# Altium PCB ADC_PCB.PcbDoc
Units mil, origin at the board's own origin, x right, y up, seen from the top; angles counter-clockwise.
Board outline 2700 x 1900 mil, 4 copper layers (Top Layer, VDD, GND, Bottom Layer), stack 23.756 mil thick; 46 components, 27 nets, 144 pads, 55 vias.
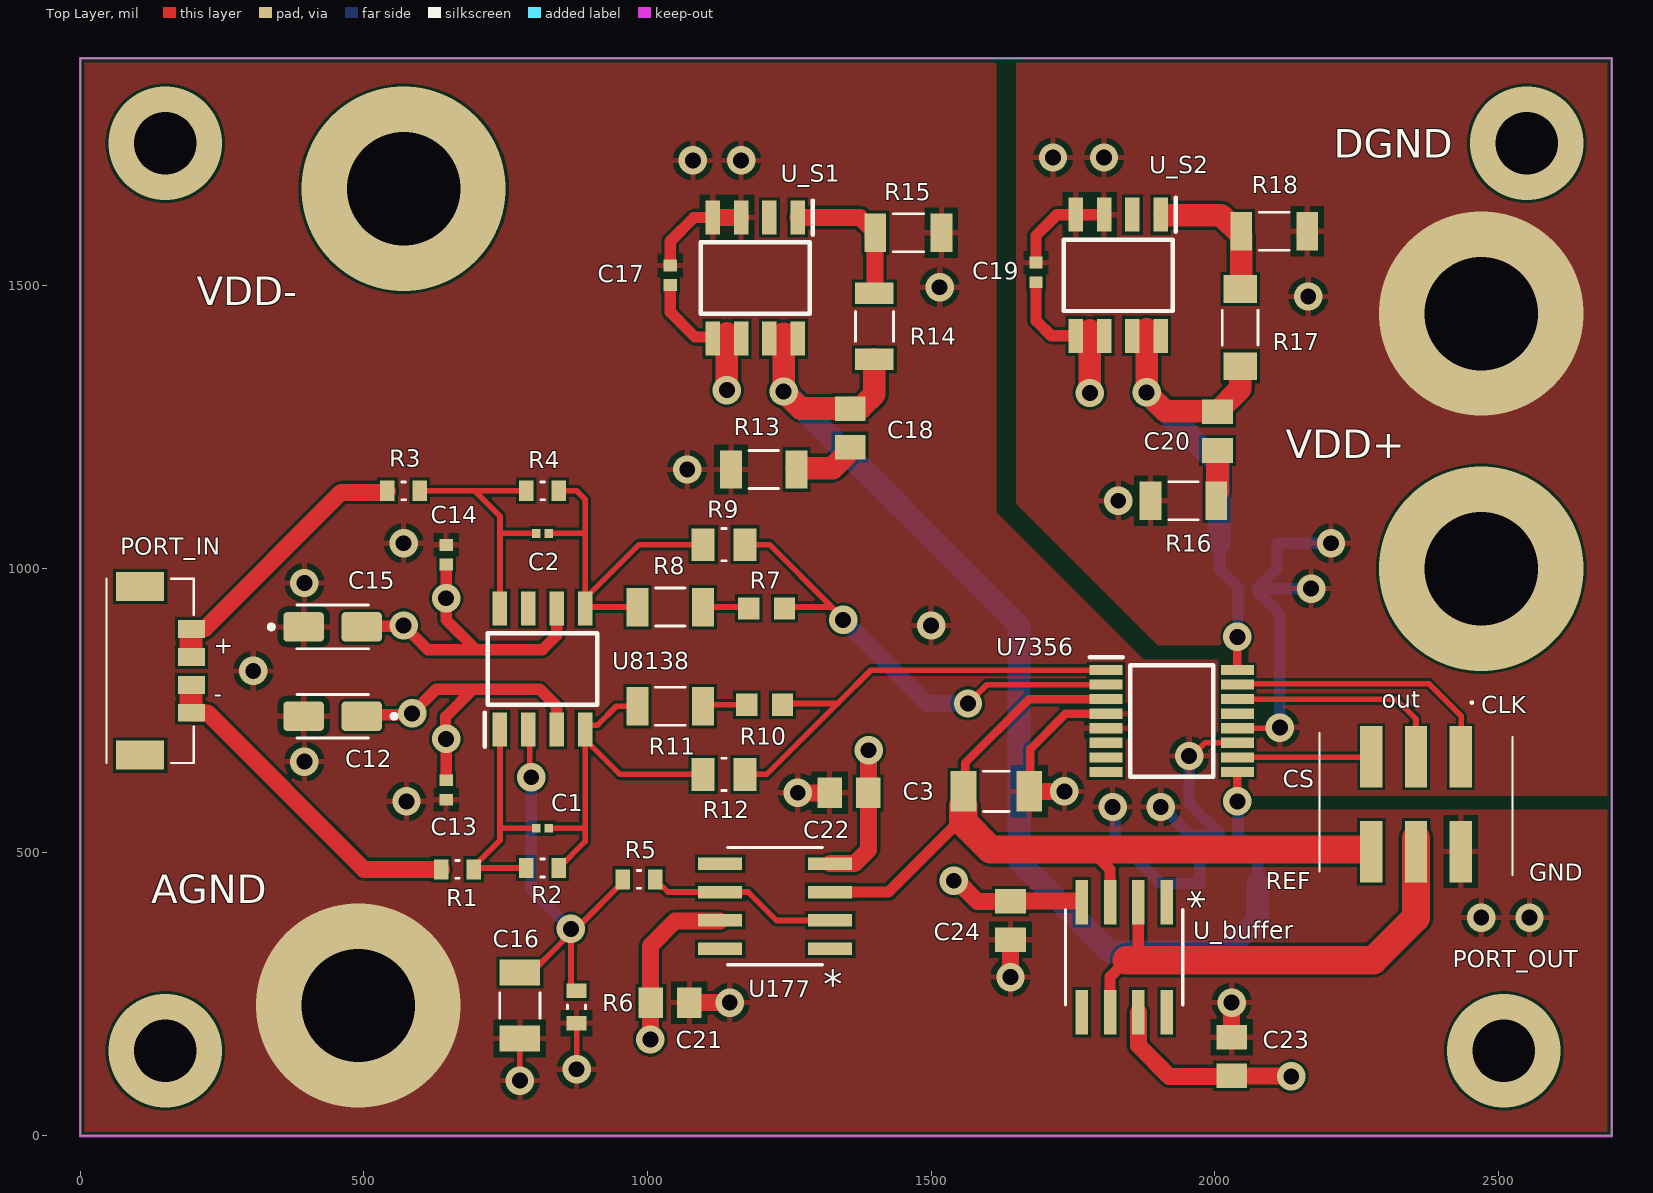
[diagram p0: Top Layer view]
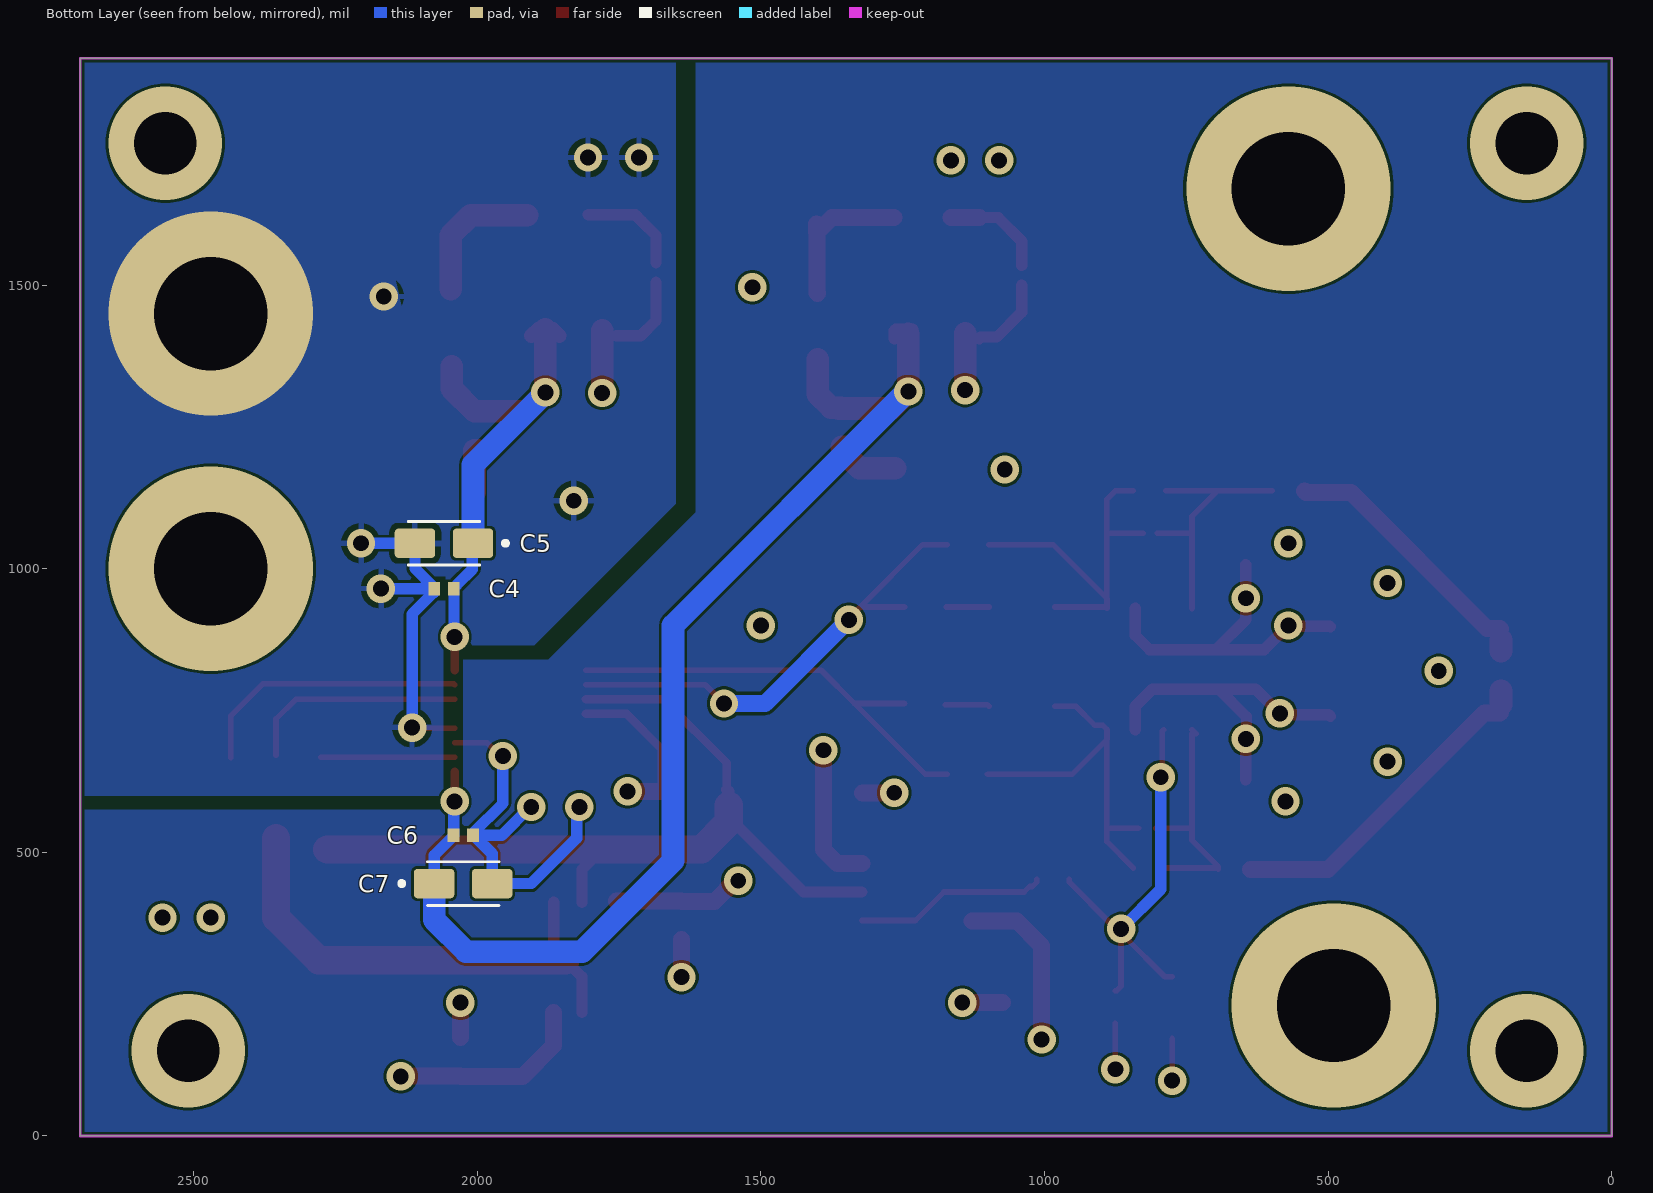
[diagram p1: Bottom Layer view, seen from below]
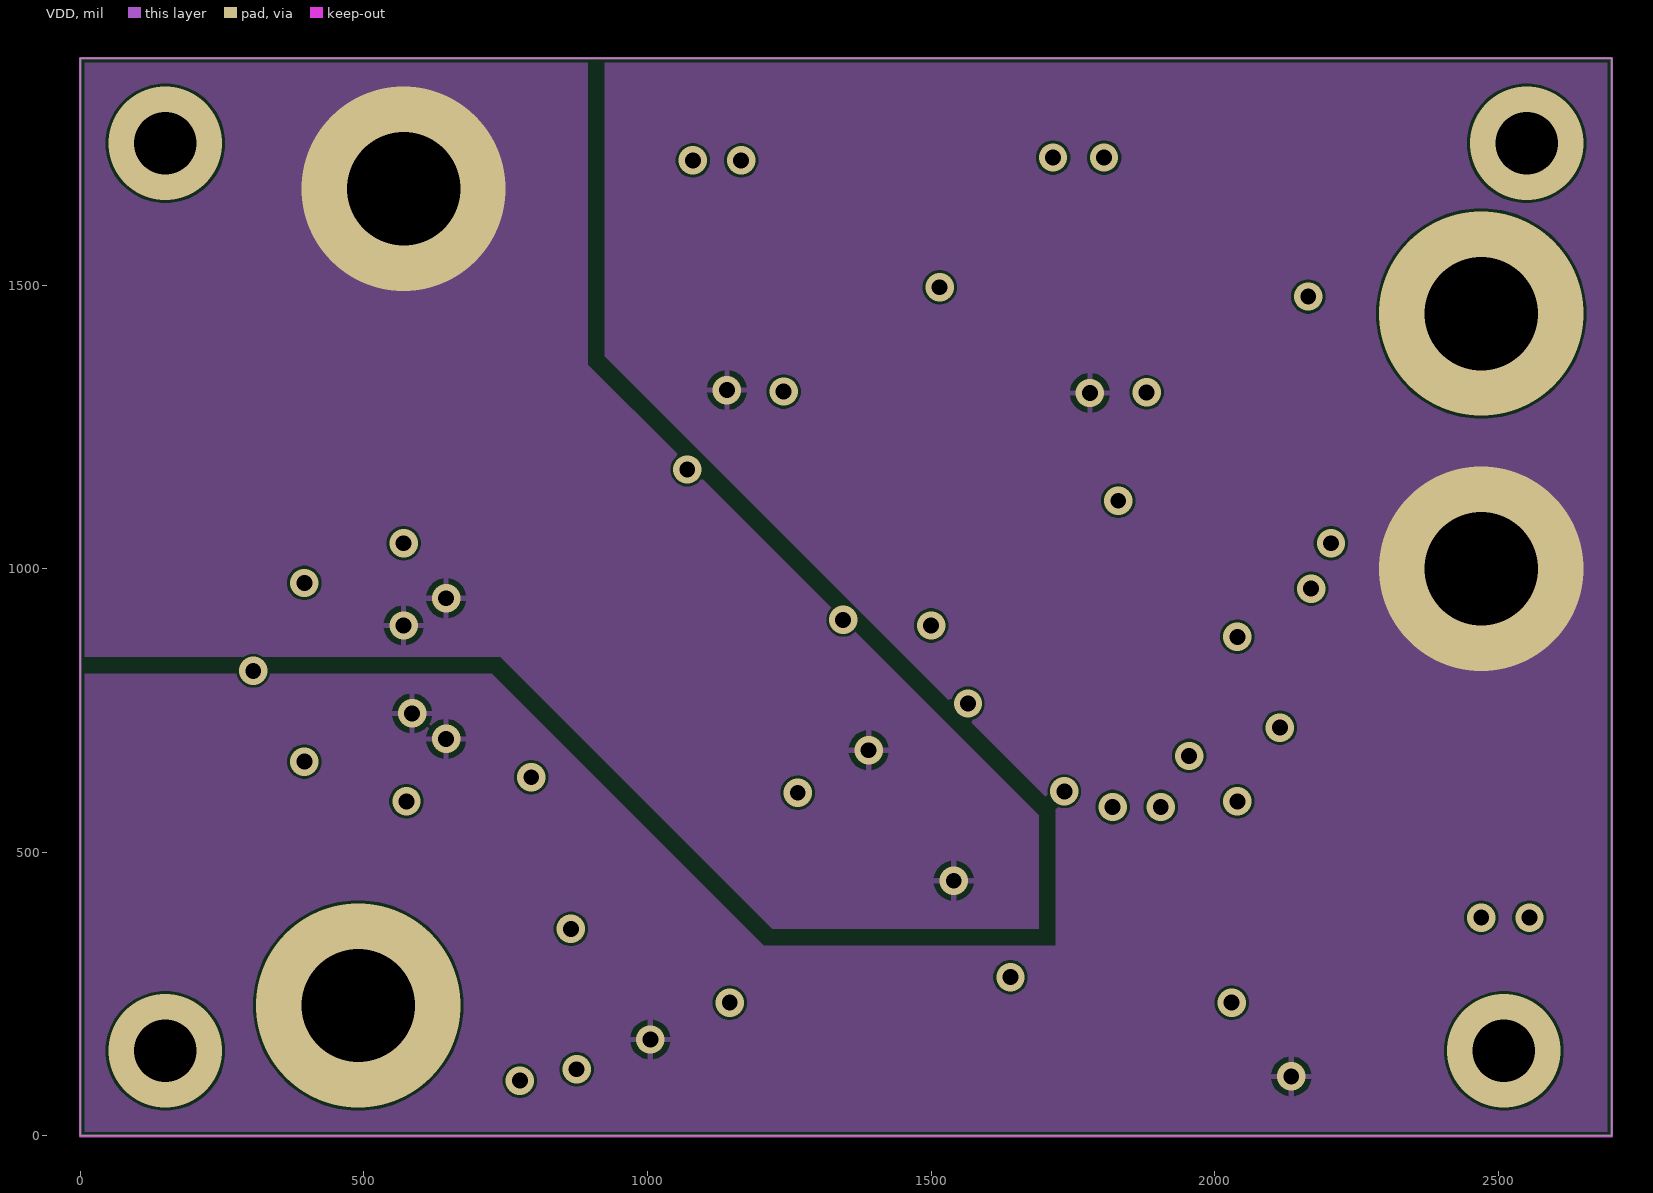
[diagram p2: VDD]
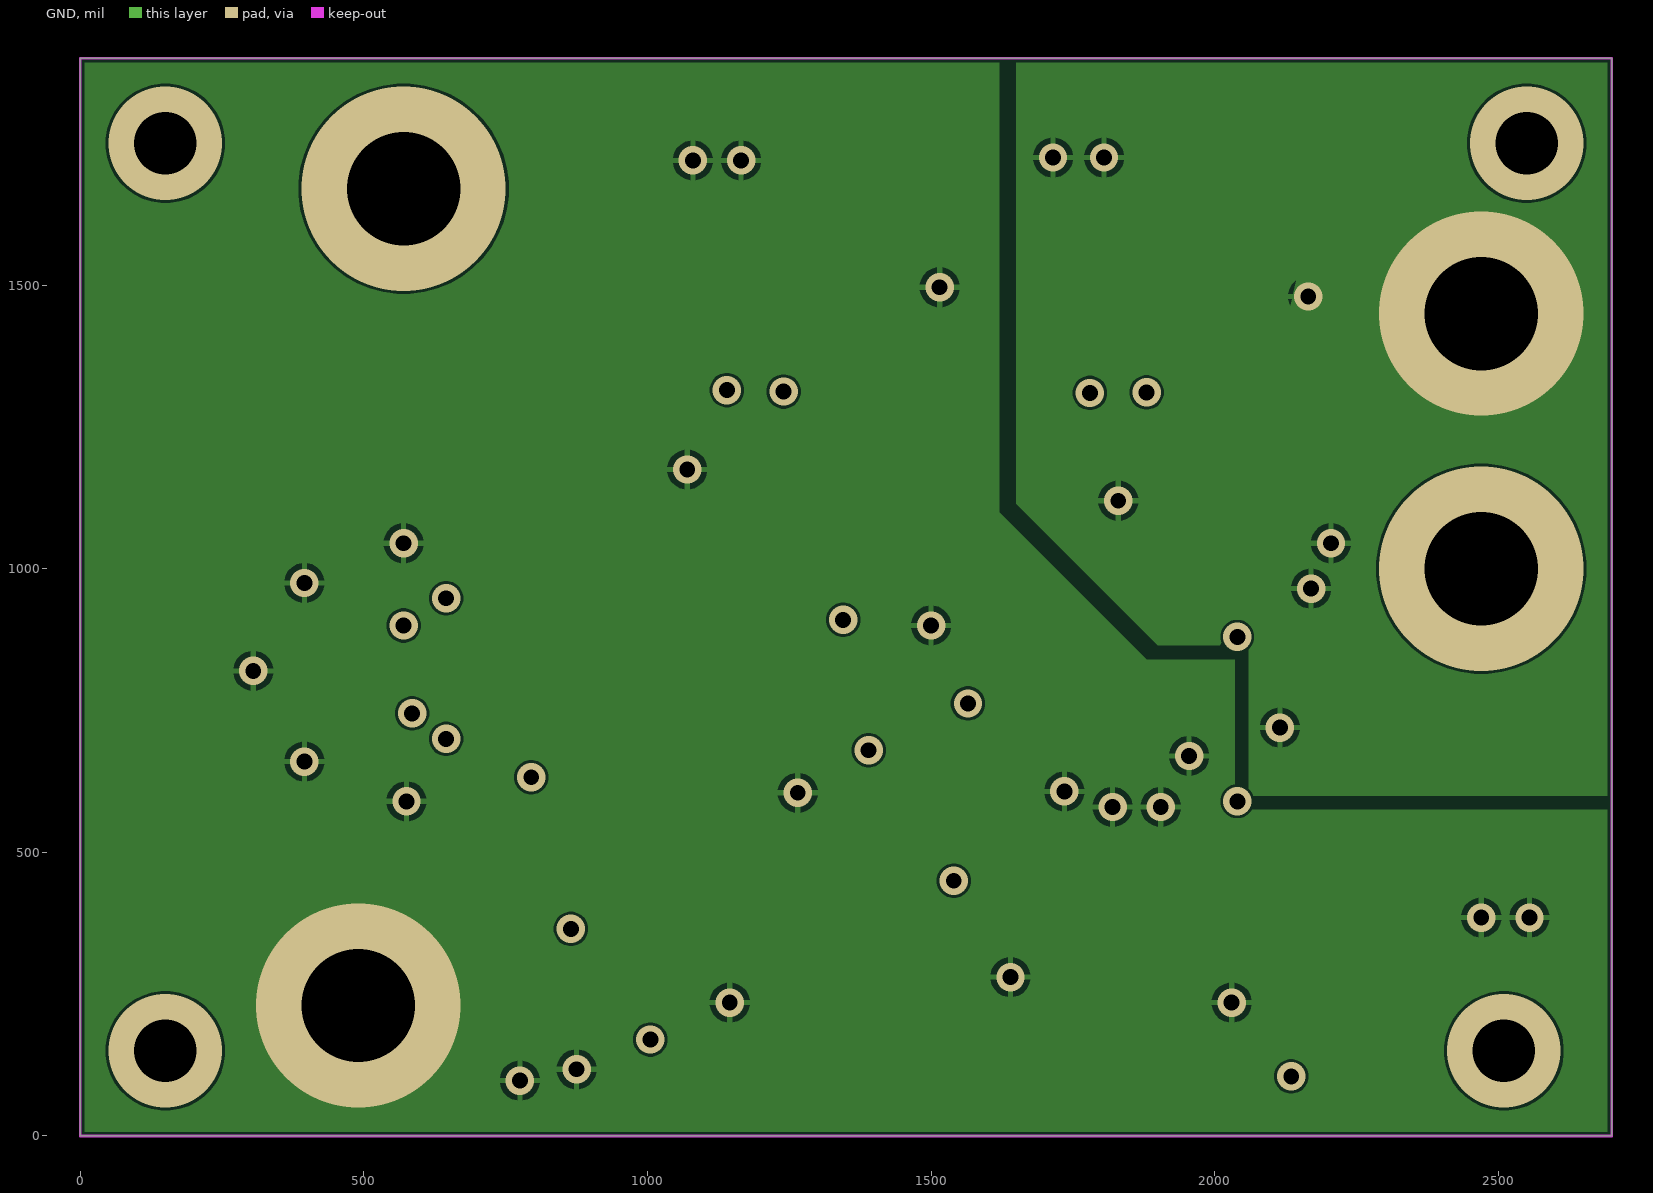
[diagram p3: GND]

## Layer stack, top to bottom
Top Solder: solder mask 0.4, Solder Resist, Dk 3.5
Top Layer: signal copper 1.4
Dielectric 1: prepreg 2.8, PP-006, Dk 4.1
VDD: signal copper 1.378
Dielectric 2: prepreg 12.6, FR-4, Dk 4.8
GND: signal copper 1.378
Dielectric 3: prepreg 2.8, PP-006, Dk 4.1
Bottom Layer: signal copper 1.4
Bottom Solder: solder mask 0.4, Solder Resist, Dk 3.5

## Board outline
0,0 2700,0 2700,1900 0,1900

## Design rules (kind name [scope] priority, off if disabled: settings)
Clearance [All] p1: gap=5 ignorepadtopadclearanceinfootprint=FALSE
PolygonConnect [All] p1: connectstyle=Relief reliefconductorwidth=10 reliefentries=4 polygonreliefangle="90 Angle" airgapwidth=10
RoutingVias [All] p1: holewidth=28 width=50 viastyle="Through Hole" minholewidth=28 minwidth=50 maxholewidth=400 maxwidth=500
SilkToSilkClearance [All] p1: silktosilkclearance=5
SolderMaskExpansion [All] p1: expansion=4 istentingtop=FALSE
Width [All] p1: maxlimit=100 minlimit=10 preferedwidth=10
29 further rules are at their usual default settings.

## Classes and differential pairs
component class ADC_Connectors: PORT_IN PORT_OUT

## Components (designator, comment, footprint, x,y, rotation, side; value= is the part's Value field where it differs from the comment)
C1 "GRM0335C1E390JA01D" CAPC0603X33N 815,542.5 r180 top
C2 "GRM0335C1E390JA01D" CAPC0603X33N 815,1062.5 r180 top
C3 "1206ZC106KAT2A" CAPC3216X178N 1615,607.5 r0 top
C4 "C1005X5R1C104K050BA" CAPC1005X55N 2058.82,965 r0 bottom
C5 "TAJA106M010RNJ" CAPMP3216X180N 2058.82,1045 r0 bottom
C6 "C1005X5R1C104K050BA" CAPC1005X55N 2025,530 r180 bottom
C7 "TAJA106M010RNJ" CAPMP3216X180N 2025,445 r180 bottom
C12 "TAJA106M010RNJ" CAPMP3216X180N 445,740 r180 top
C13 "C1005X5R1C104K050BA" CAPC1005X55N 645,610 r270 top
C14 "C1005X5R1C104K050BA" CAPC1005X55N 645,1025 r270 top
C15 "TAJA106M010RNJ" CAPMP3216X180N 445,897.5 r0 top
C16 "1206ZC106KAT2A" CAPC3216X178N 775,230 r90 top
C17 "C1005X5R1C104K050BA" CAPC1005X55N 1040,1517.5 r90 top
C18 "CL21A475KQFNNNG" CAPC2012X135N 1357.34,1248.52 r270 top
C19 "C1005X5R1C104K050BA" CAPC1005X55N 1685,1522.5 r90 top
C20 "CL21A475KQFNNNG" CAPC2012X135N 2005,1242.5 r270 top
C21 "CL21A106KPFNNNG" CAPC2012X135N 1040,235 r0 top
C22 "CL21A106KPFNNNG" CAPC2012X135N 1355,605 r180 top
C23 "CL21A106KPFNNNG" CAPC2012X135N 2030,140 r90 top
C24 "CL21A106KPFNNNG" CAPC2012X135N 1640,380 r270 top
PORT_IN "505567-0481" 5055670481 132.95,820 r90 top
PORT_OUT "87832-0628" 878320628 2355,585 r180 top
R1 "ERA3ARW103V" RES_ERA3ARW103V 665,470 r180 top
R2 "ERA3ARW103V" RES_ERA3ARW103V 815,472.5 r0 top
R3 "ERA3ARW103V" RES_ERA3ARW103V 570,1137.5 r0 top
R4 "ERA3ARW103V" RES_ERA3ARW103V 815,1137.5 r0 top
R5 "ERA3ARW103V" RES_ERA3ARW103V 985,452.5 r0 top
R6 "ERA3ARW103V" RES_ERA3ARW103V 875,227.5 r270 top
R7 "RG1608N-101-W-T1" RESC1608X50N 1210,930 r0 top
R8 "RNCF1206AKT10R0" RESC3015X65N 1040,932.5 r180 top
R9 "RG2012N-470-W-T1" RESC2012X50N 1135,1042.5 r0 top
R10 "RG1608N-101-W-T1" RESC1608X50N 1206.5,760 r0 top
R11 "RNCF1206AKT10R0" RESC3015X65N 1040,757.5 r0 top
R12 "RG2012N-470-W-T1" RESC2012X50N 1135,637.5 r0 top
R13 "RNCF1206AKT10R0" RESC3015X65N 1205,1175 r0 top
R14 "RQ73C2B174KBTD" RESC3116X75N 1400,1427.5 r90 top
R15 "RQ73C2B169KBTD" RESC3116X75N 1460,1592.5 r0 top
R16 "RNCF1206AKT10R0" RESC3015X65N 1945,1120 r0 top
R17 "ERJ8ENF2873V" RES_ERJ8ENF2873V 2045,1425 r90 top
R18 "RQ73C2B169KBTD" RESC3116X75N 2105,1595 r0 top
U177 "OP177GSZ" R_8_ADI 1225,405 r180 top
U7356 "AD7356BRUZ" SOP65P640X120-16N 1924.33,731.61 r0 top
U8138 "AD8138ARZ" SOIC127P600X175-8N 814.84,823.39 r90 top
U_buffer "OP177GSZ" R_8_ADI 1840.51,315 r270 top
U_S1 "TPS76601D" SOIC127P600X175-8N 1190,1512.5 r270 top
U_S2 "TPS76601D" SOIC127P600X175-8N 1830,1517.5 r270 top

## Footprints (in the part's own frame and the unit in brackets; to place one, negate y for a bottom-side part, rotate by r counter-clockwise, add the part's x,y. Pads: shape width x height; smd on the part's side, far side on the other; paste and mask are expansions set on the pad)
878320628 [mm]
  rect 1x2.75 smd: 1(-2,-2.125) 2(-2,2.125) 3(0,-2.125) 4(0,2.125) 5(2,-2.125) 6(2,2.125)
  silkscreen extent -4.33,-4.6 4.33,3.17, body extent -4.33,-3.15 4.33,3.15, height 7.6
5055670481 [mm]
  rect 0.8x1.2 smd: 1(1.875,-1.6) 2(0.625,-1.6) 3(-0.625,-1.6) 4(-1.875,-1.6)
  rect 1.3x2.15 smd: MP1(-3.775,0.695) MP2(3.775,0.695)
  silkscreen extent -4.13,-1.7 4.13,2.2, body extent -4.3,-2.12 4.3,2.2, height 4.3
CAPC0603X33N [mm]
  rect 0.38x0.4 smd: 1(-0.281,0) 2(0.281,0)
CAPC1005X55N [mm]
  rect 0.53x0.6 smd: 1(-0.437,0) 2(0.437,0)
CAPC2012X135N [mm]
  rect 1.1x1.38 smd: 1(-0.863,0) 2(0.863,0)
CAPC3216X178N [mm]
  rect 1.16x1.82 smd: 1(-1.475,0) 2(1.475,0)
  silkscreen extent -0.57,-0.9 0.57,0.9
CAPMP3216X180N [mm]
  rrect25% 1.81x1.32 smd: 1(-1.3,0) 2(1.3,0)
  silkscreen extent -2.85,-0.98 1.6,0.98
R_8_ADI [mil]
  rect 78x22 smd paste+0 mask+0: 1(-97,75) 2(-97,25) 3(-97,-25) 4(-97,-75) 5(97,-75) 6(97,-25) 7(97,25) 8(97,75)
  silkscreen extent -84,-104 84,104, body extent -129,-143 129,143, height 71
RES_ERA3ARW103V [mm]
  rect 0.65x0.9 smd: 1(-0.725,0) 2(0.725,0)
  silkscreen extent -0.08,-0.4 0.08,0.4
RES_ERJ8ENF2873V [mm]
  rect 1.25x1.5 smd: 1(-1.725,0) 2(1.725,0)
  silkscreen extent -0.78,-0.8 0.78,0.8
RESC1608X50N [mm]
  rect 0.95x1 smd: 1(-0.8,0) 2(0.8,0)
  body extent -0.8,-0.4 0.8,0.4, height 0.5
RESC2012X50N [mm]
  rect 1.04x1.47 smd: 1(-0.94,0) 2(0.94,0)
  silkscreen extent -0.1,-0.72 0.1,0.72
RESC3015X65N [mm]
  rect 0.98x1.72 smd: 1(-1.47,0) 2(1.47,0)
  silkscreen extent -0.66,-0.85 0.66,0.85
RESC3116X75N [mm]
  rect 0.97x1.73 smd: 1(-1.48,0) 2(1.48,0)
  silkscreen extent -0.67,-0.85 0.67,0.85
SOIC127P600X175-8N [mm]
  rect 1.525x0.65 smd: 1(-2.712,1.905) 2(-2.712,0.635) 3(-2.712,-0.635) 4(-2.712,-1.905) 5(2.712,-1.905) 6(2.712,-0.635) 7(2.712,0.635) 8(2.712,1.905)
  silkscreen extent -3.47,-2.45 1.6,2.58, body extent -3,-2.45 3,2.45, height 1.75
SOP65P640X120-16N [mm]
  rect 1.475x0.45 smd: 1(-2.938,2.275) 2(-2.938,1.625) 3(-2.938,0.975) 4(-2.938,0.325) 5(-2.938,-0.325) 6(-2.938,-0.975) 7(-2.938,-1.625) 8(-2.938,-2.275) 9(2.938,-2.275) 10(2.938,-1.625) 11(2.938,-0.975) 12(2.938,-0.325) 13(2.938,0.325) 14(2.938,0.975) 15(2.938,1.625) 16(2.938,2.275)
  silkscreen extent -3.67,-2.5 1.85,2.85, body extent -3.2,-2.5 3.2,2.5, height 1.2

## Part data
C1 C2: "SMD Capacitor C0G(EIA) with Capacitance: 39pF Tol. 5%. Rated Voltage: 25Vdc", Package=None, Availability=Unavailable, MP=GRM0335C1E390JA01D, Price=None
C3 C16: "10ÂµF Â±10% 10V Ceramic Capacitor X7R 1206 (3216 Metric)", Package="3216 AVX", Availability=Warning, MF=AVX, MP=1206ZC106KAT2A, Price=None, Purchase-URL=https://pricing.snapeda.com/search/part/1206ZC106KAT2A/?ref=eda, SnapEDA_Link=https://www.snapeda.com/parts/1206ZC106KAT2A/AVX/view-part/1765308/?ref=snap
C4 C6 C13 C14 C17 C19: "CERAMIC CAPACITOR, 0.1UF, 16V, X5R, 10%, 0402", Package=None, Availability=Unavailable, MP=C1005X5R1C104K050BA, Price=None
C5 C7 C12 C15: "10ÂµF Molded Tantalum Capacitors 10V 1206 (3216 Metric) 3Ohm", Package="1206 AVX", Arrow_Electronics-Purchase-URL=https://snapeda.com/shop?store=Arrow+Electronics&id=1681918, Availability=Warning, MF=AVX, Mouser-Purchase-URL=https://snapeda.com/shop?store=Mouser&id=1681918, MP=TAJA106M010RNJ, Price=None, SnapEDA_Link=https://www.snapeda.com/parts/TAJA106M010RNJ/AVX/view-part/1681918/?ref=snap
C18 C20: "4.7U 6.3V K0805 X5R", Package=None, Availability=Unavailable, MP=CL21A475KQFNNNG, Price=None
C21 C22 C23 C24: "10ÂµF Â±10% 10V Ceramic Capacitor X5R 0805 (2012 Metric)", Package="0805 Samsung", Arrow_Electronics-Purchase-URL=https://snapeda.com/shop?store=Arrow+Electronics&id=3598324, Digi-Key_Part_Number=1276-6456-1-ND, DigiKey-Purchase-URL=https://snapeda.com/shop?store=DigiKey&id=3598324, MF="Samsung Electro-Mechanics", Mouser-Purchase-URL=https://snapeda.com/shop?store=Mouser&id=3598324, MP=CL21A106KPFNNNG, SnapEDA_Link=https://www.snapeda.com/parts/CL21A106KPFNNNG/Samsung%20Electro-Mechanics/view-part/3598324/?ref=snap
PORT_IN PORT_OUT: "Connector", Manufacturer_Name=Molex
  PORT_IN: Datasheet Link=https://www.molex.com/pdm_docs/sd/5055670481_sd.pdf?webSyncID=090114e7-ea8e-9787-c070-e8582bec0296&sessionGUID=29b40bcb-654c-95cb-c1cd-5a8d15012bd5, Height=4.2mm, Manufacturer_Part_Number=505567-0481
  PORT_OUT: Datasheet Link=https://www.molex.com/pdm_docs/sd/878322020_sd.pdf, Height=7.8mm, Manufacturer_Part_Number=87832-0628
R1 R2 R3 R4 R5 R6 R8 R9 R11 R12 R13 R14 R15 R16 R17 R18: Package=None, Availability=Unavailable, Price=None
  R1 R2 R3 R4 R5 R6: MP=ERA3ARW103V
  R8 R11 R13 R16: MP=RNCF1206AKT10R0
  R9 R12: MP=RG2012N-470-W-T1
  R14: MP=RQ73C2B174KBTD
  R15 R18: MP=RQ73C2B169KBTD
  R17: MP=ERJ8ENF2873V
R7 R10: "Resistor", Manufacturer_Name=Susumu, Datasheet Link=https://componentsearchengine.com/Datasheets/1/RG1608N-101-W-T1.pdf, Height=0.5mm, Manufacturer_Part_Number=RG1608N-101-W-T1
U177 U_buffer: "No Description Available", Built_By=EMA_UL_Team, Copyright="Copyright (C) 2021 Accelerated Designs. All rights reserved", Manufacturer_Part_Number=OP177GSZ, RefDes=RefDes, SourceLibrary=Analog_2012-01-01_9, Type=DEV, Vendor="Analog Devices Inc"
U7356: "Integrated Circuit", Manufacturer_Name="Analog Devices", Datasheet Link=http://www.analog.com/static/imported-files/data_sheets/AD7356.pdf, Height=1.2mm, Manufacturer_Part_Number=AD7356BRUZ
U8138: "Integrated Circuit", Manufacturer_Name="Analog Devices", Mouser2 Part Number=584-AD8138ARZ, Datasheet Link=https://componentsearchengine.com//AD8138ARZ.pdf, Height=1.75mm, Manufacturer_Part_Number=AD8138ARZ, Mouser2 Price/Stock=https://www.mouser.com/Search/Refine.aspx?Keyword=584-AD8138ARZ
U_S1 U_S2: "Integrated Circuit", Manufacturer_Name="Texas Instruments", Datasheet Link=https://www.ti.com/lit/ds/symlink/tps766.pdf?ts=1633601131788&ref_url=https%253A%252F%252Fwww.ti.com%252Fstore%252Fti%252Fen%252Fp%252Fproduct%252F%253Fp%253DTPS76601D%2526keyMatch%253DTPS76601D%2526tisearch%253Dsearch-everything%2526usecase%253DOPN, Height=1.75mm, Manufacturer_Part_Number=TPS76601D

## Via types
v1: diameter 50, hole 28, Top Layer to Bottom Layer, 47 vias
v2: diameter 360, hole 200, Top Layer to Bottom Layer, 4 vias
v3: diameter 200, hole 110, Top Layer to Bottom Layer, 4 vias

## Nets (pads, with @x,y where several pads share a name; then routed paths per layer and width w, separated by ;. In a path a pad name is that pad's centre, name@x,y a point inside that pad or via, vN(x,y) a via of type N, cw(c..) or ccw(c..) an arc to the next point about the centre after c; other vN are vias at no path point)
ADC_in_n: R7.2 R9.2 U7356.2 | length 845.8
  Top Layer w10: R9.2 1215,1042.5 1325,932.5 ; R7.2@1247.01,932.5 1325,932.5 ; v1(1345,910) 1345,912.5 1325,932.5 ; v1(1565,762.5) 1598.09,795.59 U7356.2
  Bottom Layer w30: v1(1345,910) 1492.5,762.5 v1(1565,762.5)
ADC_in_p: R10.2 R12.2 U7356.1 | length 800.7
  Top Layer w10: R12.2 1210,637.5 1335,762.5 ; R10.2@1247.01,762.5 1335,762.5 ; U7356.1 1393.68,821.18 1335,762.5
ADCAVDD: C6.1 C7.1 C18.1 R14.1 U7356.9 U_S1.7 U_S1.8 | length 2182.1
  Top Layer w15: v1(2040,590) U7356.9
  Top Layer w20: 1231.77,1422.5 1262.2,1422.5 1265,1419.7 U_S1.8
  Top Layer w40: 1240,1414.27 v1(1240,1312.5) 1270,1282.5 C18.1 ; C18.1@1362.85,1282.5 C18.1 ; R14.1 1400,1307.59 1376.57,1284.15 1359,1284.15 C18.1
  Bottom Layer w20: v1(2040,590) 2041.77,588.23 C6.1@2041.77,530 ; C6.1@2041.77,529.06 2076.18,494.65 C7.1
  Bottom Layer w40: v1@1243.89,1311.11 1655,900 1655,485 1815,325 2020,325 2076.18,381.18 C7.1
ADCCS: PORT_OUT.5 U7356.10 | length 236.3
  Top Layer w10: U7356.10 PORT_OUT.5@2276.26,667.64
ADCDVDD: C4.1 C5.1 C20.1 R17.1 U7356.16 U_S2.7 U_S2.8 | length 944.7
  Top Layer w15: U7356.16 v1(2040,880)
  Top Layer w25: U_S2.7 1866.77,1422.5 1880,1422.5 1893.23,1422.5 U_S2.8
  Top Layer w40: 1880,1422.5 v1(1880,1310.93) 1913.43,1277.5 2005,1277.5 2045,1317.5 R17.1
  Bottom Layer w20: C5.1@2008.82,1035.98 2008.82,999.17 C4.1@2035.91,972.09 ; v1(2040,880) 2041.18,881.18 2041.18,964.57 C4.1
  Bottom Layer w40: v1(1880,1310.93) 2007.64,1183.29 C5.1
ADCSCLK: PORT_OUT.1 U7356.15 | length 492.5
  Top Layer w10: U7356.15 2041.76,797.35 2377.65,797.35 2435,740 PORT_OUT.1@2435,666.95
AGND: C3.2 C6.2 C7.2 C12.2 C13.2 C14.1 C15.1 C16.1 C17.2 C21.2 C22.2 C23.2 C24.2 PORT_OUT.2 R6.2 R13.1 R15.2 U7356.4 U7356.5 U7356.11 U_S1.3 U_S1.4 | length 1607.3
  Top Layer w10: v1(775,97.5) C16.1 ; v1(875,117.5) R6.2 ; C3.2 C3.2@1675,609.43 ; v1(1955,670) 1955,674.14 1960.86,680 1970,680 1983.23,693.23 U7356.11
  Top Layer w15: C3.2@1675,609.43 1675,682.5 1736.91,744.41 U7356.4
  Top Layer w20: C17.2 1040,1577.5 1081.77,1619.27 U_S1.4
  Top Layer w30: C21.2 v1(1145,235) ; U_S1.4 U_S1.3 ; v1(1265,605) C22.2 ; v1(1640,280) C24.2 ; C3.2 v1(1735,607.5) ; C23.2 v1(2030,235)
  Bottom Layer w20: v1(1820,580) 1825,575 1825,525 1905,445 C7.2 ; v1(1905,580) 1906.92,580 1956.92,530 C6.2 2007.36,530.43 2007.36,534.02 1955,586.38 v1(1955,670) ; C7.2@1973.82,450 1973.82,497.4 2004.61,528.19 C6.2@2007.36,528.19
  other v1: 2470,385 2555,385 575,590 395,660 305,820 1500,900 395,975 570,1045 1070,1175 1515.18,1496.4 1080,1720 1165,1720
  other v2: 490,230
DGND: C4.2 C5.2 C19.2 R16.1 R18.2 U7356.12 U_S2.3 U_S2.4 | length 795.3
  Top Layer w10: U7356.12 2113.82,718.82 v1(2115,720)
  Top Layer w20: C19.2 1685,1587.56 1710,1612.56 1721.72,1624.27 U_S2.4 U_S2.3
  Bottom Layer w15: C4.2 C4.2@2076.02,966.38
  Bottom Layer w20: C4.2 v1(2170.11,965) ; C4.2@2076.02,966.38 2110,1000.35 C5.2 v1(2205,1045) ; C4.2@2077.08,957.92 2115,920 v1(2115,720)
  other v1: 1830,1120 2165,1480 1715,1725 1805,1725
  other v2: 2470,1450
NetC1_1: C1.1 R2.2 R11.1 R12.1 U8138.4 | length 664.3
  Top Layer w10: 834.4,542.5 890,542.5 ; R2.2 890,518.96 890,542.5 ; R11.1 945,757.5 911.78,724.28 897.5,724.28 U8138.4 889.84,699.39 U8138.4@890,699.23 ; R12.1@1100.47,637.5 R12.1 951.73,637.5 U8138.4@890,699.23 ; 890,542.5 U8138.4@890,699.23
NetC1_2: C1.2 R1.1 R2.1 U8138.1 | length 425.6
  Top Layer w10: R1.1 693.54,474.92 740,521.38 740,542.5 ; R1.1@693.62,472.5 R2.1 ; U8138.1@732.5,708.96 U8138.1@740,716.46 ; U8138.1@740,708.96 740,542.5 ; C1.2 740,542.5
NetC2_1: C2.1 R4.2 R8.2 R9.1 U8138.5 | length 649.7
  Top Layer w10: C2.1 890,1062.5 ; R4.2 875,1137.5 890,1122.5 890,1062.5 ; R8.2 892.18,932.5 890,930.32 890,930.16 U8138.5 889.84,947.38 U8138.5@890,947.54 ; R9.1 984.96,1042.5 U8138.5@890,947.54 ; U8138.5@890,947.54 890,1062.5
NetC2_2: C2.2 R3.2 R4.1 U8138.8 | length 475.5
  Top Layer w10: R3.2 695,1137.5 ; U8138.8@740,930 740,1062.5 ; R4.1 695,1137.5 ; C2.2@801.46,1062.5 740,1062.5 ; 695,1137.5 740,1092.5 740,1062.5
NetC16_2: C16.2 R5.1 R6.1 U8138.2 | length 768.7
  Top Layer w10: C16.2@775,280.57 787.99,280.57 857.35,349.93 857.35,364.85 v1@865,372.5 ; U8138.2@790,716.46 792.42,714.04 792.42,635.08 v1(795,632.5) ; R6.1 872.8,256.04 865,263.84 v1@865,372.5 ; R5.1 956.46,447.58 881.38,372.5 v1@865,372.5
  Bottom Layer w20: v1(795,632.5) 795,435 v1(865,365)
NetC18_2: C18.2 R13.2 | length 116.1
  Top Layer w40: R13.2@1263.58,1177.5 1326.75,1177.5 1350.18,1200.93 1350.18,1212.89 1351.83,1214.55 C18.2
NetC20_2: C20.2 R16.2 | length 81.1
  Top Layer w40: C20.2@1997.83,1206.87 1999.49,1208.52 C20.2 R16.2@2005,1135.28
NetR5_2: R5.2 U177.2 U177.6 | length 341.4
  Top Layer w10: R5.2 1013.54,447.58 1021.34,439.78 1026.26,439.78 1036.04,430 1177.5,430 1227.5,380 U177.2
NetR7_1: R7.1 R8.1 | length 75.1
  Top Layer w10: R8.1 R7.1@1172.99,932.5
NetR10_1: R10.1 R11.2 | length 78.2
  Top Layer w10: R11.2 1100.37,760 R10.1
NetR14_2: R14.2 R15.1 U_S1.1 | length 274.8
  Top Layer w10: U_S1.1 U_S1.1@1268.23,1622.5
  Top Layer w30: U_S1.1 1374.96,1619.27 1394.25,1599.98 1401.73,1607.46 R15.1 1400.87,1591.63 1400.87,1486.63 R14.2
NetR17_2: R17.2 R18.1 U_S2.1 | length 244.4
  Top Layer w40: U_S2.1@1912.2,1623.39 2011.61,1623.39 2046.73,1588.27 R17.2@2046.73,1492.91
REFADC: C3.1 PORT_OUT.6 U177.3 U7356.3 U_buffer.3 | length 1514.3
  Top Layer w10: C3.1@1545,582.58 1545,595.57 C3.1
  Top Layer w15: C3.1@1560,610.57 1560,657.5 1672.5,770 U7356.3
  Top Layer w20: U177.3 1425,430 1545,550 ; C3.1 C3.1@1560,610.57 ; 1780,505 1815.51,469.49 U_buffer.3
  Top Layer w50: C3.1@1556.93,582.58 1556.93,553.07 1605,505 1780,505 PORT_OUT.6@2265,505
REFADC_BUFFERED: PORT_OUT.4 U_buffer.2 U_buffer.6 | length 879.8
  Top Layer w20: U_buffer.6 1815.51,280.51 1845,310 ; 1865.51,317.5 U_buffer.2
  Top Layer w50: 1845,310 2280,310 2355,385 PORT_OUT.4 PORT_OUT.4@2355,525
SDATAA: PORT_OUT.3 U7356.14 | length 392.9
  Top Layer w10: U7356.14 2320,770 2355,735 PORT_OUT.3@2355,671.62
VDD+: C12.1 C13.1 C17.1 C19.1 C21.1 C23.1 U177.7 U8138.3 U_buffer.7 U_S1.5 U_S1.6 U_S2.5 U_S2.6 | length 1763.7
  Top Layer w20: C12.1 498.68,742.5 582.5,742.5 v1(585,745) 627.5,787.5 692.5,787.5 ; C13.1@645,627.64 v1(645,700) ; v1@645,708.12 v1(645,700) ; U8138.3@840,716.46 840,757.5 810,787.5 692.5,787.5 ; C17.1 1040,1452.5 1083.92,1408.58 1112.2,1408.58 1115,1405.78 U_S1.5 ; C19.1 1685,1437.5 1711.77,1410.73 U_S2.5 ; v1(645,700) 643.89,701.11 643.89,738.89 692.5,787.5
  Top Layer w30: v1(1005,170) 1005,335 1048.75,378.75 U177.7@1128,378.75 ; U_buffer.7 1865.51,159.49 1920,105 C23.1@2030,105 ; C23.1 2030.51,105.51 2134.49,105.51 v1(2135,105)
  Top Layer w40: v1(1140,1315) 1140,1415 ; v1(1780,1310) 1780,1420
  other v2: 2470,1000
VDD-: C14.2 C15.2 C22.1 C24.1 U177.4 U8138.6 U_buffer.4 | length 1081.2
  Top Layer w20: C15.2 497.43,898.75 568.75,898.75 v1(570,900) 612.5,857.5 697.5,857.5 ; C14.2@645,1007.36 v1(645,947.96) 644.91,947.87 644.91,910.09 697.5,857.5 ; U8138.6 839.84,882.34 815,857.5 697.5,857.5
  Top Layer w30: U177.4 1365,480 1390,505 1390,590 C22.1@1389.49,590.51 ; C22.1@1389.49,585.51 C22.1@1389.49,590.51 ; v1(1390,680) 1389.49,679.49 C22.1@1389.49,590.51 ; v1(1540,450) 1545.41,450 1581.91,413.5 1639.52,413.5 C24.1 U_buffer.4@1755,413.98
  other v2: 570,1670
Vin+: PORT_IN.1 PORT_IN.2 R3.1 | length 466.7
  Top Layer w30: PORT_IN.1 196.69,894.57 219.57,894.57 459.78,1134.78 539.25,1134.78 541.46,1136.99 R3.1
  Top Layer w40: PORT_IN.2@195,855 195,875
Vin-: PORT_IN.3 PORT_IN.4 R1.2 | length 579.9
  Top Layer w30: PORT_IN.4 196.69,745.43 224.57,745.43 500,470 R1.2
  Top Layer w40: PORT_IN.4@195,760 PORT_IN.3@195,785
pads on no net: PORT_IN.MP1 PORT_IN.MP2 U177.1 U177.5 U177.8 U7356.6 U7356.7 U7356.8 U7356.13 U8138.7 U_buffer.1 U_buffer.5 U_buffer.8 U_S1.2 U_S2.2
copper on no net:
  other v3: 150,150 2510,150 150,1750 2550,1750

## Polygon pours and split planes (outlines as drawn)
VDD+ on VDD "VDD+_L02_P001" (solid, pour order 1): 925,1900 925,1375 1720,580 1720,335 1205,335 725,815 0,815 0,0 2700,0 2700,1900
VDD- on VDD "VDD-_L02_P000" (solid, pour order 0): 0,1900 895,1900 895,1360 1690,565 1690,365 1220,365 740,845 0,845
DGND on GND "DGND_L03_P006" (solid, pour order 6): 2700,1900 2700,600 2060,600 2060,865 1900,865 1650,1115 1650,1900
AGND on GND "AGND_L03_P007" (solid, pour order 7): 0,0 0,1900 1620,1900 1620,1100 1880,840 2035,840 2035,575 2700,575 2700,0
DGND on Top Layer "DGND_L01_P011" (solid, pour order 11): 2700,1900 2700,600 2060,600 2060,865 1900,865 1650,1115 1650,1900
AGND on Top Layer "AGND_L01_P008" (solid, pour order 8): 0,0 0,1900 1615,1900 1615,1100 1875,840 2030,840 2030,575 2700,575 2700,0
no net on Bottom Layer "Bottom_AGND" (solid, pour order 12): 0,0 0,1900 1615,1900 1615,1100 1875,840 2025,840 2025,625 2025,575 2700,575 2700,0
DGND on Bottom Layer "Bottom_DGND" (solid, pour order 14): 1650,1900 1650,1115 1900,865 2060,865 2060,600 2700,600 2700,1900

## Keep-outs
Keep-Out Layer:
  the board outline again, w5

## Silkscreen, mask and mechanical layers (free items; w line width, h text height)
Top Overlay:
  text "DGND" at 2210,1725 h50
  text "VDD-" at 205,1465 h50
  text "VDD+" at 2125,1195 h50
  text "+" at 235,850 h30
  text "-" at 235,765 h30
  text "out" at 2295,755 h30
  text "CLK" at 2470,745 h30
  text "CS" at 2120,615 h30
  text "GND" at 2555,450 h30
  text "REF" at 2090,435 h30
  text "AGND" at 125,410 h50

## Text inside footprints (layer, text, board x,y; h text height)
U177: Top Overlay "*" at 1344.5,313 h50 r180; Mechanical 7 "0.05in/1.27mm" at 1403.25,623.5 h25 r180; Mechanical 7 "0.05in/1.27mm" at 1604.5,367.5 h25 r180; Mechanical 7 "0.197in/5.004mm" at 1026.5,417.5 h25 r180; Mechanical 7 "0.244in/6.198mm" at 1318.75,136.5 h25 r180; Mechanical 7 "0.157in/3.988mm" at 1318.75,211.5 h25 r180; Mechanical 7 "Alt 2 Padstyle: OX90Y60D30P" at 1562.5,1003.5 h50 r180; Mechanical 7 "Alt 1 Padstyle: OX60Y90D30P" at 1562.5,943.5 h50 r180; Mechanical 7 "Pin One Padstyle: RX78Y22D0T" at 1575,763.5 h50 r180; Mechanical 7 "Default Padstyle: RX78Y22D0T" at 1575,703.5 h50 r180; Mechanical 13 "*" at 1301,359.5 h50 r180
U_buffer: Top Overlay "*" at 1932.51,434.5 h50 r270; Mechanical 7 "Default Padstyle: RX78Y22D0T" at 1542.01,665 h50 r270; Mechanical 7 "Pin One Padstyle: RX78Y22D0T" at 1482.01,665 h50 r270; Mechanical 7 "Alt 1 Padstyle: OX60Y90D30P" at 1302.01,652.5 h50 r270; Mechanical 7 "Alt 2 Padstyle: OX90Y60D30P" at 1242.01,652.5 h50 r270; Mechanical 7 "0.157in/3.988mm" at 2034.01,408.75 h25 r270; Mechanical 7 "0.244in/6.198mm" at 2109.01,408.75 h25 r270; Mechanical 7 "0.197in/5.004mm" at 1828.01,116.5 h25 r270; Mechanical 7 "0.05in/1.27mm" at 1878.01,694.5 h25 r270; Mechanical 7 "0.05in/1.27mm" at 1622.01,493.25 h25 r270; Mechanical 13 "*" at 1886.01,391 h50 r270